# EAGLE board eeprom (EAGLE 7.2.0)
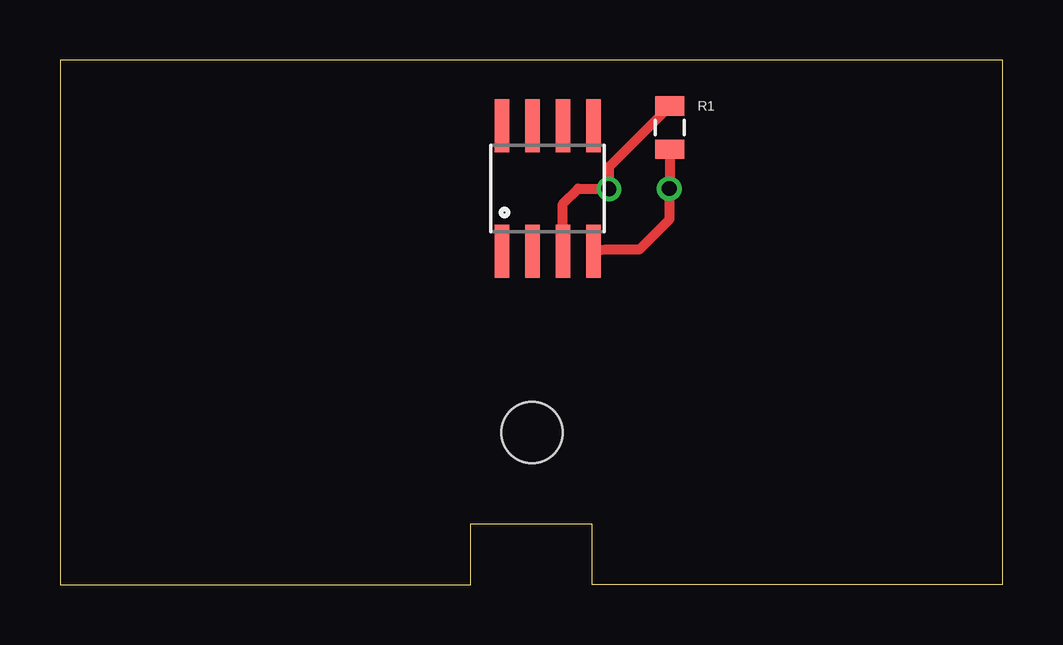
[diagram p0: board, top side]
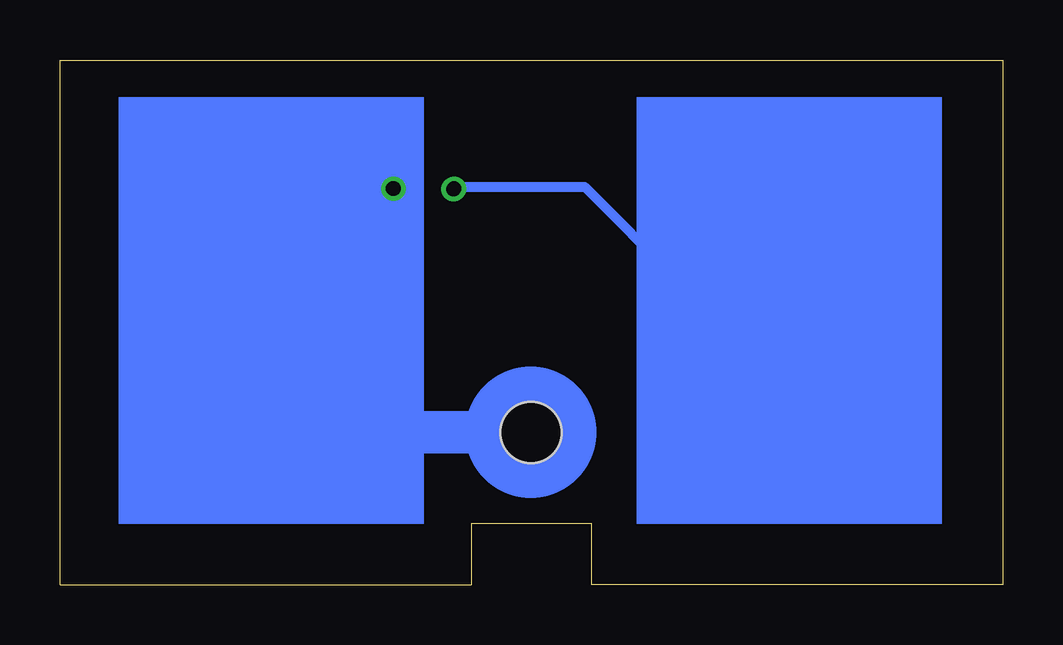
[diagram p1: board, bottom side, seen from below]

Size 39.28 x 21.87 mm. Coordinates in mm from the lower left corner, seen from the top.
Outline: 39.28,0 39.28,21.87 0,21.87 0,0 17.12,0 17.12,2.54 22.15,2.54 22.15,0 39.28,0
Copper layers (1*16): Top 0.035mm / dielectric 1.5mm / Bottom 0.035mm
Design rules "default": minimum track width 10mil, minimum drill 24mil, track to track 8mil, track to pad 8mil, pad to pad 8mil, via to via 8mil, smd to smd 8mil, copper to edge 40mil, drill to drill 8mil, minimum pad ring 10mil, minimum via ring 8mil, stop-mask expansion 4mil, vias tented up to drill 0mil, thermal gap 10mil
Holes 2.54 mm at 19.66,6.35

## Footprints (pad centres in the part's own frame; a part is rotated, then mirrored left to right if it is on the bottom)
0805 = smd 0.8 x 1.2: 1 -0.9,0; 2 0.9,0
SOIC8 = smd 0.61 x 2.21: 1 -1.905,-2.616; 2 -0.635,-2.616; 3 0.635,-2.616; 4 1.905,-2.616; 5 1.905,2.616; 6 0.635,2.616; 7 -0.635,2.616; 8 -1.905,2.616

## Placement (x,y rotation side)
R1  4.7K  [0805]  25.4,19.05 90 top
U$1  DS2433  [SOIC8]  20.32,16.51 0 top

## Library data of the parts
R1 = SparkFun-Passives
U$1 = TuansLib

## Nets
N$1: R1.1 U$1.4
N$2: R1.2 U$1.3

## Tracks (layer width: path | path; a pad name or v marks a point on that pad's centre or on a via)
N$1  (via drill 0.6)
  Top 0.406: U$1.4 22.73,13.97 24.13,13.97 25.4,15.24 v25.4,16.51 R1.1
  Bottom 0.406: v25.4,16.51 27.94,13.97 27.94,12.7
N$2  (via drill 0.6)
  Top 0.406: U$1.3 20.95,15.88 21.59,16.51 v22.86,16.51 22.86,17.41 R1.2
  Bottom 0.406: v22.86,16.51 22.78,16.59 17.42,16.59 13.54,12.7 12.7,12.7
N$3  (via drill 0.6)
  other vias: 22.89,16.48
N$4  (via drill 0.6)
  other vias: 25.37,16.51
N$5
  Bottom 1.778: 19.66,6.35 27.94,6.35
(copper drawn outside any net)
  shapes: Bottom area x2, Bottom circle x1